# EAGLE board Adafruit ATtiny1616 Breakout (EAGLE 9.6.2)
REV: A
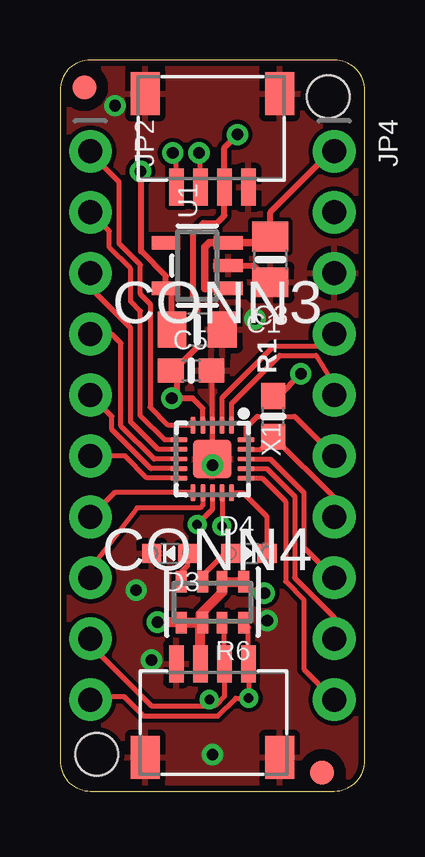
[diagram p0: board, top side]
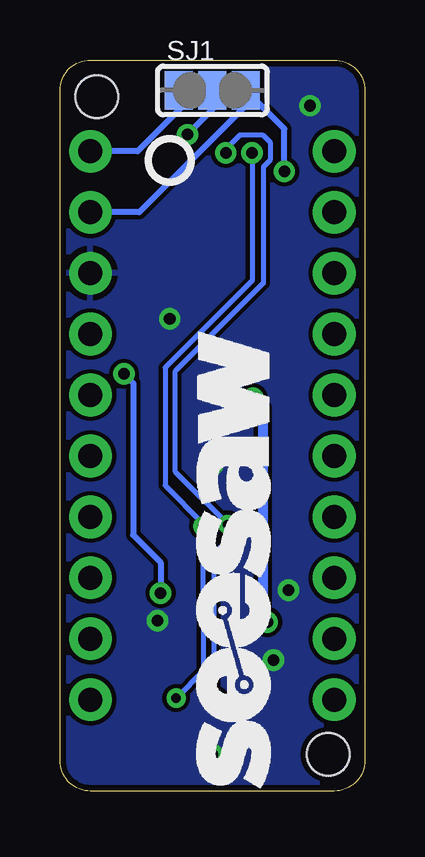
[diagram p1: board, bottom side, seen from below]

Size 12.7 x 30.48 mm. Coordinates in mm from the lower left corner, seen from the top.
Outline: 0,29.21 0,1.27 arc90 1.27,0 11.43,0 arc90 12.7,1.27 12.7,29.21 arc90 11.43,30.48 1.27,30.48 arc90 0,29.21
Copper layers (1*16): Top 0.035mm / dielectric 1.5mm / Bottom 0.035mm
Design rules "adafruit 7-7": minimum track width 7mil, minimum drill 15.5mil, track to track 7mil, track to pad 7mil, pad to pad 7mil, via to via 7mil, smd to smd 7mil, copper to edge 10mil, drill to drill 8mil, minimum pad ring 10mil, minimum via ring 8mil, stop-mask expansion 2mil, vias tented up to drill 20mil, thermal gap 10mil
Net classes: 1 highpower: width 0.254 mm, drill 0.483 mm
Holes 1.78 mm at 11.18,28.96 1.52,1.52

## Footprints (pad centres in the part's own frame; a part is rotated, then mirrored left to right if it is on the bottom)
0805_10MGAP = smd 1.2 x 1.5: 1 -1.05,0; 2 1.05,0
0805-NO = smd 1.24 x 1.5: 1 -0.95,0; 2 0.95,0
0603-NO = smd 1.075 x 1: 1 -0.85,0; 2 0.85,0
JST_SH4 = smd 0.6 x 1.55: 1 -1.5,2.006; 2 -0.5,2.006; 3 0.5,2.006; 4 1.5,2.006 | smd 1.2 x 1.8: MT1 -2.8,-1.894; MT2 2.8,-1.894
CHIPLED_0603_NOOUTLINE = smd 0.8 x 0.8: A 0,-0.75; C 0,0.75
FIDUCIAL_1MM = smd 1 x 1: 1 0,0
1X10_ROUND70 = drill 1 pad 1.778: 1 -11.43,0; 2 -8.89,0; 3 -6.35,0; 4 -3.81,0; 5 -1.27,0; 6 1.27,0; 7 3.81,0; 8 6.35,0; 9 8.89,0; 10 11.43,0
RESPACK_4X0603 = smd 0.45 x 0.9: 1 -1.3,-0.85; 2 -0.4,-0.85; 3 0.4,-0.85; 4 1.3,-0.85; 5 1.3,0.85; 6 0.4,0.85; 7 -0.4,0.85; 8 -1.3,0.85
SOLDERJUMPER_2WAY_OPEN_NOPASTE = smd 1.168 x 1.6: 1 -1.397,0; 2 0,0; 3 1.397,0
SOT23-5 = smd 0.55 x 1.2: 1 -0.95,-1.3; 2 0,-1.3; 3 0.95,-1.3; 4 0.95,1.3; 5 -0.95,1.3
QFN20_3MM = smd 0.7 x 0.2: 1 -1.4,0.8; 2 -1.4,0.4; 3 -1.4,0; 4 -1.4,-0.4; 5 -1.4,-0.8; 11 1.4,-0.8; 12 1.4,-0.4; 13 1.4,0; 14 1.4,0.4; 15 1.4,0.8 | smd 0.2 x 0.7: 6 -0.8,-1.4; 7 -0.4,-1.4; 8 0,-1.4; 9 0.4,-1.4; 10 0.8,-1.4; 16 0.8,1.4; 17 0.4,1.4; 18 0,1.4; 19 -0.4,1.4; 20 -0.8,1.4 | smd 1.6 x 1.6: PAD 0,0

## Placement (x,y rotation side)
C1  10uF  [0805_10MGAP]  5.71,19.24 0 top
C3  10uF  [0805-NO]  8.76,22.16 270 top
C5  0.1uF  [0603-NO]  5.46,17.53 0 top
CONN3  STEMMA_I2C_QT  [JST_SH4]  6.35,27.18 180 top
CONN4  STEMMA_I2C_QT  [JST_SH4]  6.35,3.3 0 top
D3  Green  [CHIPLED_0603_NOOUTLINE]  4.57,9.91 90 top
D4  Red  [CHIPLED_0603_NOOUTLINE]  7.87,9.91 270 top
FID1  FIDUCIAL_1MM  [FIDUCIAL_1MM]  10.92,0.76 0 top
FID2  FIDUCIAL_1MM  [FIDUCIAL_1MM]  1.02,29.34 0 top
JP2  [1X10_ROUND70]  1.27,15.24 270 top
JP4  [1X10_ROUND70]  11.43,15.24 270 top
PLABEL0  [PLABEL0]  2.54,19.05 0 top
PLABEL1  [PLABEL1]  2.54,21.59 0 top
PLABEL2  [PLABEL2]  2.67,13.97 0 top
PLABEL3  [PLABEL3]  2.67,11.43 0 top
PLABEL4  [PLABEL4]  2.67,8.89 0 top
PLABEL5  [PLABEL5]  2.67,6.41 90 top
PLABEL6  [PLABEL6]  2.79,3.94 90 top
PLABEL7  [PLABEL7]  10.54,2.41 0 top
PLABEL8  [PLABEL8]  9.59,8.89 0 top
PLABEL9  [PLABEL9]  9.91,13.46 0 top
PLABEL10  [PLABEL10]  10.03,16.51 90 top
PLABEL11  [PLABEL11]  9.65,19.05 0 top
PLABEL12  [PLABEL12]  9.65,6.48 0 top
PLABEL13  [PLABEL13]  10.03,21.59 0 top
PLABEL14  [PLABEL14]  9.65,24.51 0 top
PLABEL15  [PLABEL15]  10.03,26.8 270 top
PLABEL17  [PLABEL17]  2.67,24 0 top
PLABEL18  [PLABEL18]  2.73,26.92 0 top
PLABEL19  [PLABEL19]  2.92,23.62 0 top
PLABEL20  [PLABEL20]  2.92,21.21 0 top
PLABEL21  [PLABEL21]  2.92,18.54 0 top
PLABEL22  [PLABEL22]  2.41,9.4 0 top
PLABEL23  [PLABEL23]  10.03,19.18 0 top
PLABEL24  [PLABEL24]  2.41,27.3 0 top
PLABEL25  [PLABEL25]  2.41,24.38 0 top
PLABEL26  [PLABEL26]  9.78,2.79 0 top
PLABEL27  [PLABEL27]  1.65,27.56 0 top
PLABEL28  [PLABEL28]  2.67,16.51 0 top
PLABEL29  [PLABEL29]  3.05,16.13 0 top
PLABEL30  [PLABEL30]  3.05,13.59 0 top
PLABEL31  [PLABEL31]  9.14,19.56 0 top
PLABEL32  [PLABEL32]  9.02,16.76 0 top
PLABEL33  [PLABEL33]  9.78,13.46 0 top
PLABEL35  [PLABEL35]  2.92,16.51 90 bottom
PLABEL36  [PLABEL36]  2.92,18.92 90 bottom
PLABEL37  [PLABEL37]  2.92,21.59 90 bottom
PLABEL38  [PLABEL38]  2.92,13.97 90 bottom
PLABEL39  [PLABEL39]  2.92,11.43 90 bottom
PLABEL40  [PLABEL40]  2.92,9.02 90 bottom
PLABEL41  [PLABEL41]  2.79,6.29 90 bottom
PLABEL42  [PLABEL42]  2.92,3.68 90 bottom
PLABEL43  [PLABEL43]  2.92,24.13 90 bottom
PLABEL44  [PLABEL44]  9.91,6.35 90 bottom
PLABEL45  [PLABEL45]  9.91,8.7 90 bottom
PLABEL46  [PLABEL46]  9.78,14.35 90 bottom
PLABEL47  [PLABEL47]  9.78,16.51 90 bottom
PLABEL48  [PLABEL48]  9.78,19.05 90 bottom
PLABEL49  [PLABEL49]  9.91,3.81 90 bottom
PLABEL50  [PLABEL50]  9.84,11.43 90 bottom
PLABEL51  [PLABEL51]  9.78,21.59 90 bottom
PLABEL52  [PLABEL52]  9.91,24 90 bottom
PLABEL53  [PLABEL53]  9.91,26.54 90 bottom
PLABEL54  [PLABEL54]  2.92,26.54 90 bottom
PLABEL55  [PLABEL55]  2.16,29.72 0 bottom
PLABEL56  [PLABEL56]  6.22,27.43 0 bottom
PLABEL57  [PLABEL57]  7.37,0.64 90 bottom
PLABEL58  [PLABEL58]  9.4,29.08 90 bottom
PLABEL100  [PLABEL100]  3.17,10.67 0 top
PLABEL101  [PLABEL101]  6.99,25.15 90 bottom
R1  10K  [0603-NO]  8.89,15.62 90 top
R6  10K Pack  [RESPACK_4X0603]  6.35,7.87 180 top
SJ1  [SOLDERJUMPER_2WAY_OPEN_NOPASTE]  6.35,29.21 0 bottom
U1  AP2127K-3.3  [SOT23-5]  5.71,21.91 90 top
U$7  [SEESAW_LOGO]  3.94,0.13 90 bottom
U$12  [PCBFEAT-REV-040]  8.13,26.29 270 bottom
X1  ATTINY8X6_QFN  [QFN20_3MM]  6.35,13.84 270 top

## Library data of the parts
C1 C3 C5 JP2 JP4 R1 R6 SJ1 U$12 = microbuilder
CONN3 CONN4 = adafruit_electromech; LCSC: C2845363
D3 D4 = microbuilder; ROT: 270
FID1 FID2 = microbuilder; BOM: EXCLUDE
PLABEL0 PLABEL1-PLABEL15 PLABEL17-PLABEL33 PLABEL35-PLABEL58 PLABEL100 PLABEL101 = pinguin
U1 = adafruit_power; JLC_ROTATION: 270
U$7 = silks
X1 = adafruit_micro; ROT: 270

## Nets
0: JP2.1 X1.5
1: JP2.2 X1.6
2: JP2.3 X1.7
3: JP2.4 X1.8
3.3V [highpower]: C1.1 JP4.2 SJ1.3 U1.5
4: JP2.5 X1.9
5: JP2.6 X1.10
10: D4.C X1.15
11: JP4.10 X1.16
12: JP4.9 X1.17
13: JP4.8 X1.18
14: JP4.6 X1.20
15: JP4.5 X1.1
16: JP4.4 X1.2
GND [highpower]: C1.2 C3.2 C5.2 CONN3.1 CONN3.MT1 CONN3.MT2 CONN4.1 CONN4.MT1 CONN4.MT2 D3.C JP4.3 U1.2 X1.3 X1.PAD
N$1: D3.A R6.4
N$4: D4.A R6.3
RXD: JP2.7 X1.11
SCL: CONN3.4 CONN4.4 JP2.10 R6.8 X1.14
SDA: CONN3.3 CONN4.3 JP2.9 R6.7 X1.13
TXD: JP2.8 X1.12
UPDI: JP4.7 R1.1 X1.19
VCC [highpower]: C5.1 CONN3.2 CONN4.2 R1.2 R6.1 R6.2 R6.5 R6.6 SJ1.2 X1.4
VIN [highpower]: C3.1 JP4.1 SJ1.1 U1.1 U1.3

## Tracks (layer width: path | path; a pad name or v marks a point on that pad's centre or on a via)
0
  Top 0.203: X1.5 4.52,15.24 3.76,16 3.76,20.31 3.35,20.72 3.35,21.95 2.46,22.83 2.46,25.39 1.27,26.58 JP2.1
1
  Top 0.203: X1.6 4.36,14.64 3.35,15.65 3.35,20.02 2.95,20.42 2.95,21.78 2.06,22.66 2.06,23.34 JP2.2
2
  Top 0.203: X1.7 4.1,14.24 2.95,15.39 2.95,19.3 1.27,20.98 JP2.3
3
  Top 0.203: JP2.4 2.16,19.05 2.54,18.67 2.54,15.22 3.92,13.84 X1.8
3.3V  (via drill 0.48)
  Top 0.254: v3.35,25.83 3.38,25.81 3.38,22.5 4.42,21.46 U1.5 4.67,20.71 C1.1
  Bottom 0.254: JP4.2 9.4,24.13 4.95,28.57 SJ1.3 3.35,27.61 v3.35,25.83
4
  Top 0.203: JP2.5 2.16,15.62 2.16,15.07 3.78,13.44 X1.9
5
  Top 0.203: X1.10 4.93,13.06 3.62,13.06 2.72,13.97 JP2.6
10
  Top 0.203: X1.15 7.62,12.44 8.62,11.44 D4.C
11
  Top 0.203: X1.16 8.42,13.04 9.4,12.06 9.4,8.73 10.16,7.97 10.16,5.08 JP4.10
12
  Top 0.203: X1.17 8.62,13.44 9.78,12.29 9.78,8.89 11.43,7.24 JP4.9
13
  Top 0.203: X1.18 8.76,13.84 10.16,12.45 10.16,10.16 JP4.8
14
  Top 0.203: X1.20 7.75,15.15 8.22,15.62 9.78,15.62 JP4.6
15
  Top 0.203: X1.1 7.15,16.16 9.15,18.16 10.67,18.16 11.43,16.92 JP4.5
16
  Top 0.203: X1.2 6.75,16.4 8.89,18.54 10.92,18.54 JP4.4
GND  (via drill 0.48)
  Top 0.203: X1.PAD X1.3 6.35,17.49 C5.2
  Top 0.254: U1.2 8.07,21.91 C3.2
  other vias: 6.35,1.52 3.81,5.46 8.13,19.68 2.29,28.57 8.64,7.11 6.35,13.59 3.17,8.38
  pour Top: 0.06,30.45 0.06,30.42 12.7,30.45 12.7,0 0.03,0
  pour Bottom: 0.06,30.45 0.06,30.42 12.7,30.45 12.7,0 0.03,0
N$1
  Top 0.203: R6.4 5.05,9.13 5.32,9.4 D3.A
N$2
  Bottom 0.254: 6.73,29.08 7.37,29.08
N$4
  Top 0.203: R6.3 5.95,9 6.86,9.91 D4.A
RXD
  Top 0.203: X1.11 2.28,12.44 JP2.7
SCL  (via drill 0.39, 0.48)
  Top 0.203: R6.8 7.85,6.82 CONN4.4 7.86,5.8 v7.86,3.87 7.32,3.87 6.57,3.13 3.47,3.13 2.67,3.94 1.4,3.94 JP2.10 | X1.14 v6.75,11.05 v6.74,11.04 | CONN3.4 4.85,26.46 v4.7,26.61
  Bottom 0.203: v4.7,26.61 4.7,21.27 8.32,17.65 8.32,12.74 6.74,11.17 v6.74,11.04 6.75,11.05 6.73,5 v7.86,3.87
SDA  (via drill 0.39, 0.48)
  Top 0.203: v6.22,3.81 6.22,3.56 | R6.7 6.85,6.92 CONN4.3 6.85,3.94 6.46,3.56 6.22,3.56 | 6.22,3.56 3.81,3.56 1.27,6.1 JP2.9 | CONN3.3 5.85,26.55 v5.79,26.61 | X1.13 6.35,11.75 v5.71,11.11
  Bottom 0.203: v6.22,3.81 6.29,3.87 6.29,9.91 5.71,10.48 v5.71,11.11 5.71,11.13 7.91,13.33 7.91,17.48 4.23,21.17 4.23,26.02 3.95,26.3 3.95,27.04 4.26,27.36 5.2,27.36 5.79,26.76 v5.79,26.61
TXD
  Top 0.203: X1.12 5.95,11.92 5.84,11.81 3.21,11.81 1.27,9.26 JP2.8
UPDI
  Top 0.203: X1.19 8.36,14.24 R1.1 11.43,12.23 JP4.7
VCC  (via drill 0.48)
  Top 0.203: X1.4 5.95,15.95 5.53,16.37
  Top 0.254: v7.39,27.37 6.85,26.83 CONN3.2 6.85,24 6.54,23.69 5.97,23.69 5.52,23.24 5.52,20.57 5.71,20.38 5.71,18.5 4.74,17.53 C5.1 4.87,17.27 4.87,16.37 | 5.53,16.37 v4.66,16.37 | R1.2 9.11,16.47 v10.03,17.4 | v8.51,8.26 8.51,8.34 8.03,8.34 R6.1
  Top 0.406: CONN4.2 5.85,6.92 | 5.85,6.92 R6.6 | 5.85,6.92 5.75,7.02 R6.5 4.09,7.02 v4.06,7.05 | R6.1 R6.2 6.75,8.27 5.85,7.37 5.85,6.92 | v4.66,16.37 4.87,16.37
  Bottom 0.254: v7.39,27.37 6.35,28.41 SJ1.2 | v10.03,17.4 9.65,17.02 9.65,10.67 8.51,9.53 v8.51,8.26
  Bottom 0.406: v4.66,16.37 4.25,15.97 4.25,15.86 4.25,7.24 v4.06,7.05
VIN
  Top 0.254: C3.1 8.76,24.13 11.3,26.67 JP4.1 | 6.6,22.86 U1.3 7.49,22.86
  Top 0.305: 7.49,22.86 8.51,22.86 C3.1 | U1.1 6.03,20.96 6.03,22.67 6.22,22.86 6.6,22.86
  Bottom 0.254: SJ1.1 7.75,28.7 7.62,28.57 7.62,28.51 9.46,26.67 JP4.1

## Text on the board
Pinguin_tBackup: * | ~ | 0 | Vin | ~ | 3v | 1 | * | 2 | G | * | 3 | * | * | ~ | 16 | 4 | * | 15 | * | 5 | * | * | 14 | 6 | tiny1616 | ~ | 7 | 13 | SDA | 12 | SCL | 11 | ~
Pinguin_bBackup: 3.3V | Vin | 0 | Vio | Vin | ATtiny1616 / Breakout | 1 | 3v | 2 | G | 3 | 16 | 4 | 15 | 5 | 14 | 6 | UPDI | 7 | 13 | SDA | 12 | SCL | 11 | STEMMA QT